# Altium PCB 海关全向控制器主控板V4.PcbDoc (part 1 of 3)
Units mil, origin at the board's own origin, x right, y up, seen from the top; angles counter-clockwise.
Board outline 3779.53 x 2795.28 mil, 2 copper layers (Top Layer, Bottom Layer), stack 65.792 mil thick; 119 components, 89 nets, 395 pads, 56 vias.
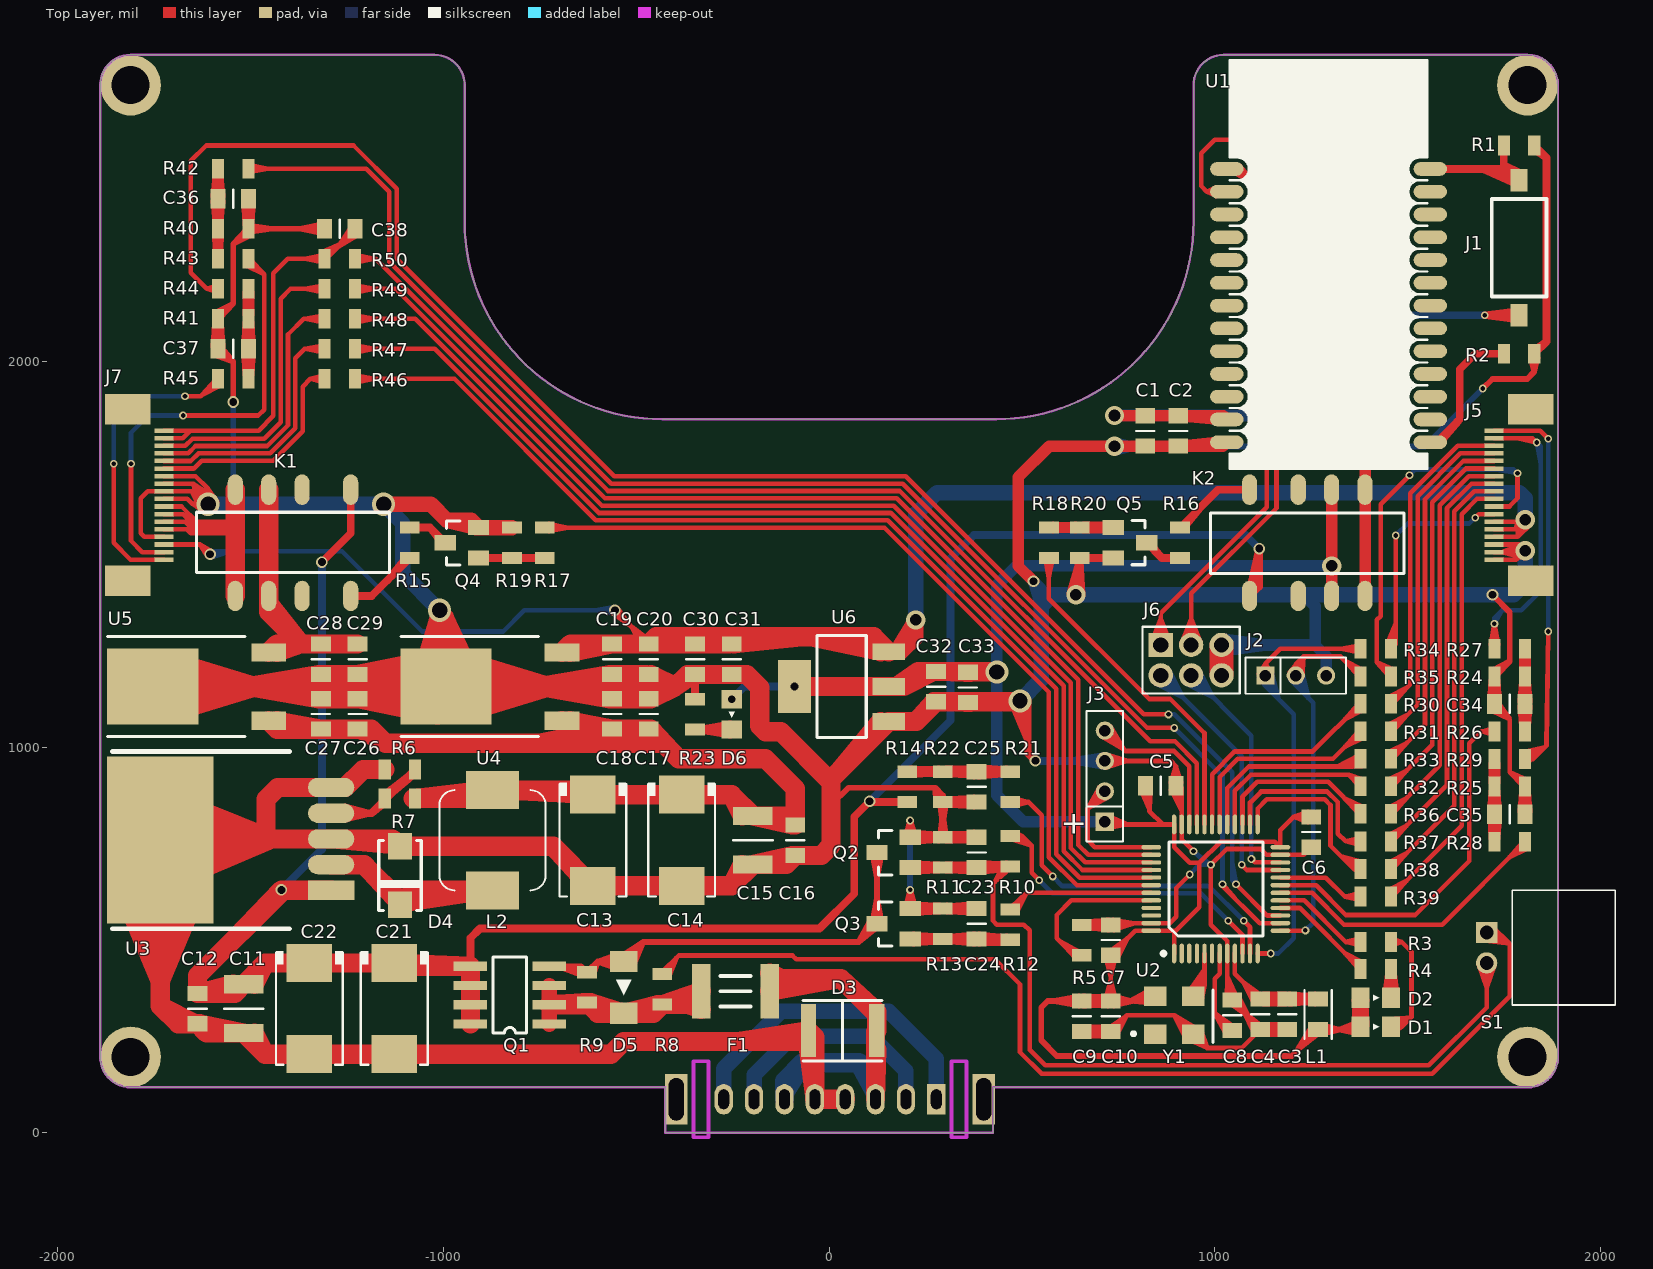
[diagram p0: Top Layer view]
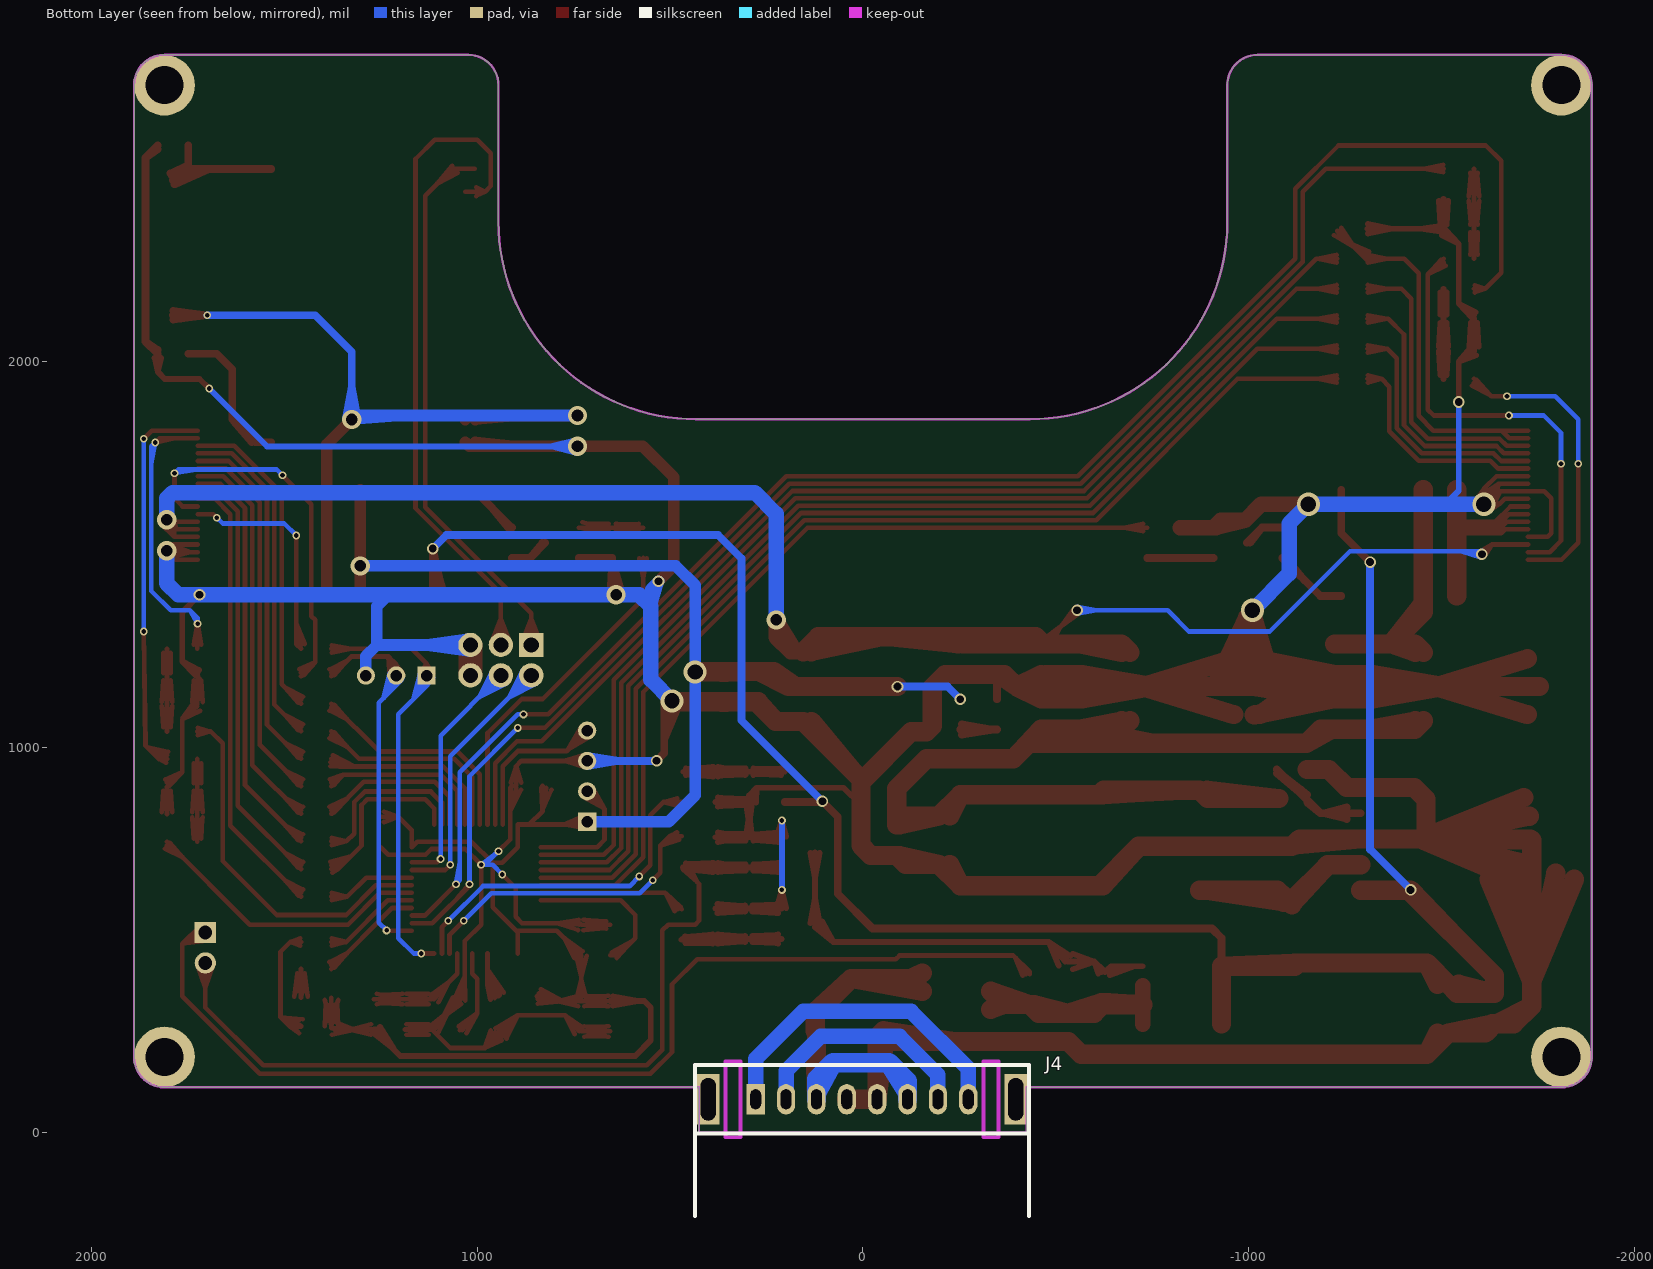
[diagram p1: Bottom Layer view, seen from below]
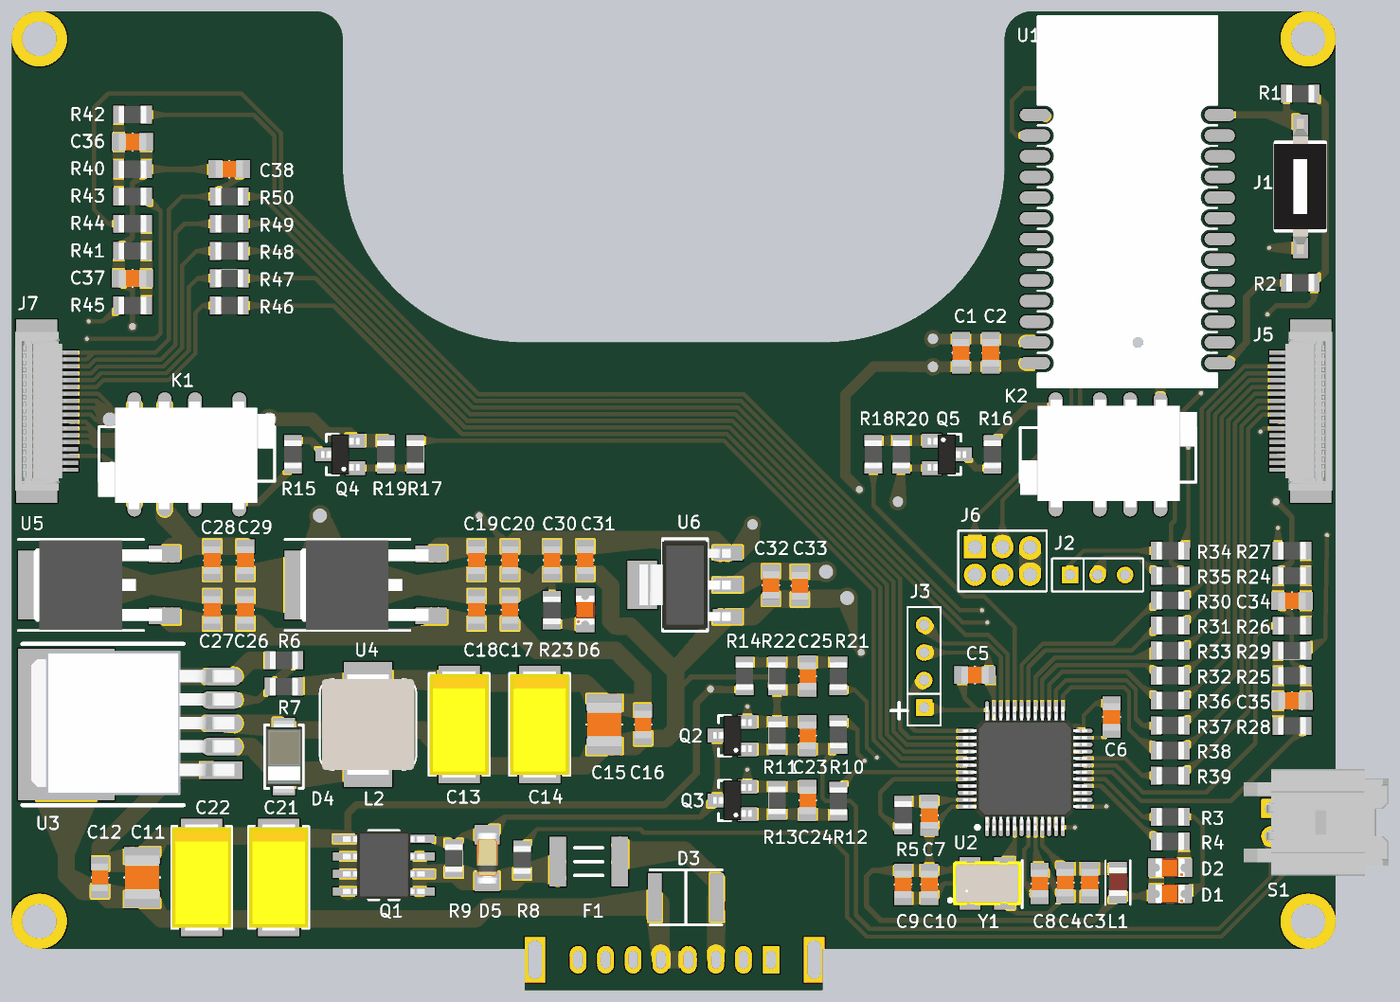
[diagram p4: 3D render of the assembled board from above, using the file's embedded part models]

## Layer stack, top to bottom
Top Solder: solder mask 0.4, Solder Resist, Dk 3.5
Top Layer: signal copper 1.4
Dielectric 1: dielectric 62.9921, FR-4, Dk 4.8
Bottom Layer: signal copper 1.4
Bottom Solder: solder mask 0.4, Solder Resist, Dk 3.5

## Board outline
-1889.76,196.85 ccw(c-1811.02,196.85) -1811.02,118.11 -425.2,118.11 -425.2,0 425.2,0 425.2,118.11 1811.02,118.11 ccw(c1811.02,196.85) 1889.76,196.85 1889.76,2716.54 ccw(c1811.02,2716.54) 1811.02,2795.28 1023.62,2795.28 ccw(c1023.62,2716.54) 944.88,2716.54 944.88,2362.21 cw(c433.07,2362.21) 433.07,1850.39 -433.07,1850.39 cw(c-433.07,2362.21) -944.88,2362.21 -944.88,2716.54 ccw(c-1023.62,2716.54) -1023.62,2795.28 -1811.02,2795.28 ccw(c-1811.02,2716.54) -1889.76,2716.54

## Design rules (kind name [scope] priority, off if disabled: settings)
Clearance [All] p1: gap=7
ComponentClearance [All] p1: gap=0 collisioncheckmode=3 verticalgap=0 showdistances=FALSE
Height [All] p1: minheight=0 maxheight=2000 prefheight=500
HoleSize [All] p1: absolutevalues=TRUE maxlimit=200 minlimit=1 maxpercent=80.000 minpercent=20.000
HoleToHoleClearance [All] p1: gap=6 allowstackedmicrovias=TRUE
MinimumSolderMaskSliver [All] p1: minsoldermaskwidth=0
PlaneConnect [All] p1: planeconnectstyle=Direct reliefexpansion=20 reliefentries=4 reliefconductorwidth=10 reliefairgap=10
PolygonConnect [All] p1: connectstyle=Direct reliefconductorwidth=10 reliefentries=4 polygonreliefangle="90 Angle" airgapwidth=10
RoutingVias [All] p1: holewidth=28 width=50 viastyle="Through Hole" minholewidth=8 minwidth=12 maxholewidth=200 maxwidth=300
SilkToSilkClearance [All] p1: silktosilkclearance=0
SilkToSolderMaskClearance [IsPad] p1: minsilkscreentomaskgap=0 clearancetoexposedcopper=TRUE
SolderMaskExpansion [All] p1: expansion=4
Width [All] p1: maxlimit=157.48 minlimit=10 preferedwidth=10
21 further rules are at their usual default settings.

## Classes and differential pairs
component class Designator: C11 C12 C13 C14 C15 C16 C17 C18 C19 C20 C21 C22 C23 C24 C25 C26 C27 C28 C29 C30 C31 C32 C33 D3 D4 D5 D6 F1 J4 K1 K2 L2 Q1 Q2 Q3 Q4 Q5 R6 R7 R8 R9 R10 R11 R12 R13 R14 R15 R16 R17 R18 R19 R20 R21 R22 R23 S1 U3 U4 U5 U6
component class 海关全向控制器主控板电路V4_系统管理: C34 C35 C36 C37 C38 J5 J6 J7 R24 R25 R26 R27 R28 R29 R30 R31 R32 R33 R34 R35 R36 R37 R38 R39 R40 R41 R42 R43 R44 R45 R46 R47 R48 R49 R50

## Components (designator, comment, footprint, x,y, rotation, side; value= is the part's Value field where it differs from the comment)
C1 "10uF" C0805 820,1820 r270 top
C2 "0.1uF" C0805 905,1820 r90 top
C3 "10uF" C0805 1187.88,307.4 r270 top
C4 "0.1uF" C0805 1117.88,307.4 r270 top
C5 "0.1uF" C0805 860,900 r0 top
C6 "0.1uF" C0805 1250,780 r270 top
C7 "0.1uF" C0805 730,500 r90 top
C8 "0.1uF" C0805 1045,305 r90 top
C9 "10uF" C0805 655,302.4 r270 top
C10 "10uF" C0805 730,302.4 r270 top
C11 "22uF" C1210 -1517.6,322.12 r270 top
C12 "0.1uF" C0805 -1637.6,322.12 r90 top
C13 "100uF/25V" C7343 -612.6,758.79 r270 top
C14 "100uF/25V" C7343 -382.6,758.79 r270 top
C15 "22uF" C1210 -197.6,758.79 r270 top
C16 "0.1uF" C0805 -87.6,758.79 r90 top
C17 "10uF" C0805 -467.6,1086.26 r90 top
C18 "0.1uF" C0805 -562.6,1086.26 r90 top
C19 "10uF" C0805 -562.6,1227.99 r270 top
C20 "0.1uF" C0805 -467.6,1227.99 r270 top
C21 "100uF/25V" C7343 -1127.6,322.12 r270 top
C22 "100uF/25V" C7343 -1347.6,322.12 r270 top
C23 "0.1uF" C0805 382.5,727.12 r90 top
C24 "0.1uF" C0805 382.5,542.12 r90 top
C25 "0.1uF" C0805 382.5,897.12 r270 top
C26 "10uF" C0805 -1222.6,1086.26 r90 top
C27 "0.1uF" C0805 -1317.6,1086.26 r90 top
C28 "10uF" C0805 -1317.6,1227.99 r270 top
C29 "0.1uF" C0805 -1222.6,1227.99 r270 top
C30 "10uF" C0805 -347.6,1227.99 r270 top
C31 "0.1uF" C0805 -252.6,1227.99 r270 top
C32 "10uF" C0805 277.4,1157.13 r270 top
C33 "0.1uF" C0805 360,1155 r270 top
C34 "0.1uF" C0805 1765,1112.14 r180 top
C35 "0.1uF" C0805 1765,826.42 r0 top
C36 "0.1uF" C0805 -1545,2422.14 r0 top
C37 "0.1uF" C0805 -1545,2032.86 r180 top
C38 "0.1uF" C0805 -1268.78,2344.29 r0 top
D1 "LED" LED0805 1417.4,275 r0 top
D2 "LED" LED0805 1417.4,350 r0 top
D3 "BA301N" BA301N 35,265 r180 top
D4 "SS14" SMA -1112.6,667.12 r270 top
D5 "ZMM16" SOD-80-S -532.6,377.12 r270 top
D6 "LED" LED0805 -252.6,1085 r270 top
F1 "2A 可恢复" F1812 -242.6,367.12 r180 top
J1 "Jack 1x2" A6S-1101-PH 1788.88,2295 r90 top
J2 "Jack 1x3" Jk1*3-2.0 1210,1185.76 r0 top
J3 "Jack 1x4" Jk1*4-2.0 715,925 r90 top
J4 "Jack 1x8" Pow-8P-M 2.4,87.12 r180 bottom
J5 "Jack 1x18" 0.5S-6X-18PB 1771.65,1653.54 r90 top locked
J6 "Jack 2x3" Jk2*3-2.0 860,1265 r0 top
J7 "Jack 1x18" 0.5S-6X-18PB -1771.65,1653.54 r270 top locked
K1 "G6K-2F-Y-12VDC" G6K-2F-Y -1390,1530 r180 top
K2 "G6K-2F-Y-12VDC" G6K-2F-Y 1240,1530 r0 top
L1 "10uH" L0805 1267.88,307.4 r90 top
L2 "33uH" L6.6*7.1mm -872.6,758.79 r90 top
Q1 "FDS4435" SO8 -827.6,357.12 r180 top
Q2 "S8050" SOT-23 167.4,727.12 r90 top
Q3 "S8050" SOT-23 167.4,542.12 r90 top
Q4 "S8050" SOT-23 -952.12,1530 r90 top
Q5 "S8050" SOT-23 780,1530 r270 top
R1 "1K" R0805 1788.88,2560 r0 top
R2 "1K" R0805 1788.88,2020 r180 top
R3 "1K" R0805 1417.4,495 r0 top
R4 "1K" R0805 1417.4,425 r0 top
R5 "100K" R0805 655,500 r90 top
R6 "2K" R0805 -1112.6,942.12 r0 top
R7 "10K" R0805 -1112.6,867.12 r0 top
R8 "500K" R0805 -432.6,372.12 r90 top
R9 "10K" R0805 -627.6,377.12 r90 top
R10 "10K" R0805 470,730 r270 top
R11 "200K" R0805 295,727.12 r90 top
R12 "1K" R0805 470,540 r270 top
R13 "10K" R0805 295,542.12 r90 top
R14 "10K" R0805 202.4,897.12 r90 top
R15 "0R" R0805 -1087.12,1530 r90 top
R16 "0R" R0805 910,1530 r270 top
R17 "1K" R0805 -737.12,1530 r90 top
R18 "1K" R0805 570,1530 r270 top
R19 "10K" R0805 -822.12,1530 r90 top
R20 "10K" R0805 650,1530 r270 top
R21 "1K" R0805 470,897.12 r90 top
R22 "1K" R0805 295,897.12 r90 top
R23 "1K" R0805 -347.6,1085 r90 top
R24 "10K" R0805 1765,1183.57 r0 top
R25 "10K" R0805 1765,897.85 r180 top
R26 "1K" R0805 1765,1040.71 r180 top
R27 "10K" R0805 1765,1255 r0 top
R28 "1K" R0805 1765,754.99 r0 top
R29 "10K" R0805 1765,969.28 r180 top
R30 "1K" R0805 1417.4,1112.88 r180 top
R31 "1K" R0805 1417.4,1041.44 r180 top
R32 "1K" R0805 1417.4,898.58 r180 top
R33 "1K" R0805 1417.4,970.01 r180 top
R34 "0R" R0805 1417.4,1255 r180 top
R35 "0R" R0805 1417.4,1183.57 r180 top
R36 "1K" R0805 1417.4,827.15 r180 top
R37 "1K" R0805 1417.4,755.72 r180 top
R38 "1K" R0805 1417.4,684.29 r180 top
R39 "1K" R0805 1417.4,612.86 r180 top
R40 "10K" R0805 -1545,2344.29 r180 top
R41 "10K" R0805 -1545,2110.71 r0 top
R42 "1K" R0805 -1545,2500 r0 top
R43 "10K" R0805 -1545,2266.43 r180 top
R44 "1K" R0805 -1545,2188.57 r180 top
R45 "10K" R0805 -1545,1955 r0 top
R46 "1K" R0805 -1268.78,1955 r0 top
R47 "1K" R0805 -1268.78,2032.86 r0 top
R48 "1K" R0805 -1268.78,2110.71 r0 top
R49 "1K" R0805 -1268.78,2188.57 r0 top
R50 "1K" R0805 -1268.78,2266.43 r0 top
S1 "SW-PB" 35363-0260 1705,480 r90 top
U1 "HC-05" HC-05 1295,2145 r0 top
U2 "STM32F103CB" LQFP48 1002.88,632.4 r90 top locked
U3 "LM2596-ADJ" TO-263-5 -1512.6,762.12 r90 top
U4 "78M05" TO-252 -842.6,1157.12 r90 top
U5 "78M05" TO-252 -1603.49,1157.12 r90 top
U6 "LM1117-3.3" SOT-223 32.4,1157.12 r90 top
Y1 "XTAL 8MHz" XTAL5032 895,305 r0 top

## Footprints (in the part's own frame and the unit in brackets; to place one, negate y for a bottom-side part, rotate by r counter-clockwise, add the part's x,y. Pads: shape width x height; smd on the part's side, far side on the other; paste and mask are expansions set on the pad)
0.5S-6X-18PB [mm]
  rect 0.3x1.25 smd: 1(-4.25,1.2) 2(-3.75,1.2) 3(-3.25,1.2) 4(-2.75,1.2) 5(-2.25,1.2) 6(-1.75,1.2) 7(-1.25,1.2) 8(-0.75,1.2) 9(-0.25,1.2) 10(0.25,1.2) 11(0.75,1.2) 12(1.25,1.2) 13(1.75,1.2) 14(2.25,1.2) 15(2.75,1.2) 16(3.25,1.2) 17(3.75,1.2) 18(4.25,1.2)
  rect 2x3 smd: ""(-5.65,-1.2) ""(5.65,-1.2)
  body extent -5.75,-2.75 5.75,1, height 1.27
35363-0260 [mm]
  rect 1.4x1.4 hole 0.9: 1(1,0)
  round 1.4 hole 0.9: 2(-1,0)
  silkscreen extent -3.8,-8.46 3.8,-1.67, body extent -3.86,-8.52 3.84,1.98, height 5.75
A6S-1101-PH [mm] "1位表贴拨码开关2.54mm间距"
  rect 1.5x1.1 smd: 1(-4.45,0) 2(4.45,0)
  silkscreen extent -3.2,-1.8 3.2,1.8, body extent -4.9,-1.92 4.9,1.92, height 3.4
BA301N [mm]
  rect 1x3.5 smd: 1(-2.25,0) 2(2.25,0)
  silkscreen extent -2.6,-2 2.6,2
C0805 [mm]
  rect 1x1.3 smd: 1(-1,0) 2(1,0)
  silkscreen extent 0,-0.6 0,0.6, body extent -1,-0.63 1,0.63, height 0.8
C1210 [mm]
  rect 1.2x2.6 smd: 1(-1.6,0) 2(1.6,0)
  silkscreen extent 0,-1.3 0,1.3, body extent -1.6,-1.25 1.6,1.25, height 0.95
C7343 [mm] "100uF/25V"
  rect 2.5x3 smd: 1(-3,0) 2(3,0)
  silkscreen extent -3.8,-2.2 3.7,2.2, body extent -3.87,-2.15 3.87,2.15, height 2.9
F1812 [mm]
  rect 1.2x3.6 smd: 1(-2.25,0) 2(2.25,0)
  silkscreen extent -1,-1 1,1, body extent -2.25,-1.65 2.25,1.65, height 0.42
G6K-2F-Y [mm]
  oval 1x2 smd: 1(-3.8,-3.5) 2(-0.6,-3.5) 3(1.6,-3.5) 4(3.8,-3.5) 5(3.8,3.5) 6(1.6,3.5) 7(-0.6,3.5) 8(-3.8,3.5)
  silkscreen extent -6.37,-2.01 6.36,1.95, body extent -6.36,-3.83 6.44,3.97, height 5.4
HC-05 [mm] "HC-05 蓝牙串口通信模块"
  oval 2.2x0.9 smd: 1(-6.7,9) 2(-6.7,7.5) 3(-6.7,6) 4(-6.7,4.5) 5(-6.7,3) 6(-6.7,1.5) 7(-6.7,0) 8(-6.7,-1.5) 9(-6.7,-3) 10(-6.7,-4.5) 11(-6.7,-6) 12(-6.7,-7.5) 13(-6.7,-9) 22(6.7,-9) 23(6.7,-7.5) 24(6.7,-6) 25(6.7,-4.5) 26(6.7,-3) 27(6.7,-1.5) 28(6.7,0) 29(6.7,1.5) 30(6.7,3) 31(6.7,4.5) 32(6.7,6) 33(6.7,7.5) 34(6.7,9)
  silkscreen extent -6.5,-10.75 6.5,16.15
Jk1*3-2.0 [mm]
  rect 1.2x1.2 hole 0.762: 1(-2,0)
  round 1.2 hole 0.762: 2(0,0) 3(2,0)
  silkscreen extent -3.3,-1.2 3.3,1.2
Jk1*4-2.0 [mm] "4P，直插，2.0mm间距，排母"
  rect 1.2x1.2 hole 0.762: 1(-3,0)
  round 1.2 hole 0.762: 2(-1,0) 3(1,0) 4(3,0)
  silkscreen extent -4.3,-1.2 4.3,1.2, body extent -4.25,-1.22 4.25,1.18, height 4.3
Jk2*3-2.0 [mm] "2.0双排座2*3-直"
  rect 1.6x1.6 hole 1: 1(0,0)
  round 1.6 hole 1: 2(0,-2) 3(2,0) 4(2,-2) 5(4,0) 6(4,-2)
  silkscreen extent -1.2,-3.2 5.2,1.2, body extent -1.03,-3.26 4.98,1.25, height 4.4
L6.6*7.1mm [mm] "AMPI0630ED"
  rect 2.5x3.5 smd: 1(-3.3,0) 2(3.3,0)
  silkscreen extent -3.3,-3.5 3.3,3.5, body extent -3.65,-3.35 3.65,3.35, height 3.13
L0805 [mm]
  rect 1x1.3 smd: 1(-1,0) 2(1,0)
  silkscreen extent -1.6,-0.9 1.6,0.9, body extent -0.95,-0.65 1.08,0.63, height 0.61
LED0805 [mm]
  rect 1.2x1.35 smd: 1(-1,0) 2(1,0)
  silkscreen extent -0.18,-0.2 0.22,0.2, body extent -1.05,-0.68 1.05,0.67, height 0.8
LQFP48 [mm]
  oval 1.3x0.28 smd: 1(-4.25,2.75) 2(-4.25,2.25) 3(-4.25,1.75) 4(-4.25,1.25) 5(-4.25,0.75) 6(-4.25,0.25) 7(-4.25,-0.25) 8(-4.25,-0.75) 9(-4.25,-1.25) 10(-4.25,-1.75) 11(-4.25,-2.25) 12(-4.25,-2.75) 25(4.25,-2.75) 26(4.25,-2.25) 27(4.25,-1.75) 28(4.25,-1.25) 29(4.25,-0.75) 30(4.25,-0.25) 31(4.25,0.25) 32(4.25,0.75) 33(4.25,1.25) 34(4.25,1.75) 35(4.25,2.25) 36(4.25,2.75)
  oval 0.28x1.3 smd: 13(-2.75,-4.25) 14(-2.25,-4.25) 15(-1.75,-4.25) 16(-1.25,-4.25) 17(-0.75,-4.25) 18(-0.25,-4.25) 19(0.25,-4.25) 20(0.75,-4.25) 21(1.25,-4.25) 22(1.75,-4.25) 23(2.25,-4.25) 24(2.75,-4.25) 37(2.75,4.25) 38(2.25,4.25) 39(1.75,4.25) 40(1.25,4.25) 41(0.75,4.25) 42(0.25,4.25) 43(-0.25,4.25) 44(-0.75,4.25) 45(-1.25,4.25) 46(-1.75,4.25) 47(-2.25,4.25) 48(-2.75,4.25)
  silkscreen extent -4.37,-3.1 3.1,3.57, body extent -4.49,-4.5 4.51,4.5, height 1.8
Pow-8P-M [mm] "笔记本电源接口8P公座"
  rect 1.2x2 hole 0.7 slot 1.3 at 90 deg: 1(-7,0)
  oval 1.2x2 hole 0.7 slot 1.3 at 90 deg: 2(-5,0) 3(-3,0) 4(-1,0) 5(1,0) 6(3,0) 7(5,0) 8(7,0)
  rect 1.5x3.3 hole 1 slot 2.8 at 90 deg: ""(-10.125,0) ""(10.125,0)
  Keep-Out Layer lines w0.254: 9,-2.5 9,2.5 8,2.5 8,-2.5 9,-2.5 ; -8,-2.5 -9,-2.5 -9,2.5 -8,2.5 -8,-2.5
  silkscreen extent -11,-7.7 11,2.25, body extent -10.77,-8 10.78,2, height 7
R0805 [mm]
  rect 0.8x1.3 smd: 1(-1,0) 2(1,0)
  body extent -1,-0.63 1,0.63, height 0.47
SMA [mm]
  rect 1.75x1.6 smd: 1(-1.925,0) 2(1.925,0)
  silkscreen extent -2.3,-1.5 2.3,1.5, body extent -2.6,-1.33 2.6,1.33, height 2.15
SO8 [mm]
  rect 2.2x0.6 smd: 1(-2.6,1.905) 2(-2.6,0.635) 3(-2.6,-0.635) 4(-2.6,-1.905) 5(2.6,-1.905) 6(2.6,-0.635) 7(2.6,0.635) 8(2.6,1.905)
  silkscreen extent -1.1,-2.5 1.1,2.5, body extent -2.97,-2.46 2.97,2.44, height 1.4
SOD-80-S [mm]
  rect 1.4x1.8 smd: 1(-1.7,0) 2(1.7,0)
  silkscreen extent -0.5,-0.5 0.5,0.5, body extent -1.85,-0.79 1.85,0.81, height 1.6
SOT-23 [mm]
  rect 1x1.4 smd: 1(-1,-1.1) 2(1,-1.1) 3(0,1.1)
  silkscreen extent -1.47,0.13 1.45,1, body extent -1.45,-1.4 1.45,1.4, height 1.3
SOT-223 [mm]
  rect 1.1x2.15 smd: 1(-2.3,-3.1) 2(0,-3.1) 3(2.3,-3.1)
  rect 3.5x2.15 smd: 4(0,3.1)
  silkscreen extent -3.35,-1.63 3.35,1.63, body extent -3.15,-3.3 3.15,3.3, height 1.8
TO-252 [mm]
  rect 1.2x2.28 smd: 1(-2.25,-3.816) 3(2.25,-3.816)
  rect 5x6 smd: 2(0,3.816)
  silkscreen extent -3.3,-2.27 3.3,6.78, body extent -3.25,-3.62 3.25,5.68, height 2.3
TO-263-5 [mil]
  rect 433.07x275.59 smd: 0(-3.33,221.44)
  rect 50x120 smd: 1(-133.33,-221.44)
  oval 50x120 smd: 2(-66.67,-221.44) 3(0,-221.44) 4(66.67,-221.44) 5(133.33,-221.44)
  silkscreen extent -233,-114 227,346, body extent -204,-258 207,321, height 177
XTAL5032 [mm]
  rect 1.5x1.3 smd: 1(-1.25,-1.25) 2(1.25,-1.25) 3(1.25,1.25) 4(-1.25,1.25)
  silkscreen extent -2.83,-1.78 2.54,1.65, body extent -2.5,-1.6 2.5,1.6, height 1.2

## Part data
C1 C11 C12 C15 C16 C17 C18 C19 C20 C23 C24 C25 C26 C27 C28 C29 C30 C31 C32 C33: library part CAP, "CAP"
C2: library part "Cap Semi"
C3 C4 C5 C6 C7 C8 C9 C10: library part Cap, "CAP"
C13 C14: library part ELECTRO, "Electrolytic Capacitor"
C21 C22: library part "Cap Poll"
C34 C35 C36 C37 C38: library part Cap, "Capacitor"
D1 D2 D6: "light emitted diode"
D4: library part Diode-Switch, "Silicon Epitaxial Planar Diodes"
D5: library part DIODE-ZENER, "Small Signal Zener Diodes"
F1: library part Fuse1
J1 J2 J3 J4 J5 J7: "插座"
J6: "双排座"
K1 K2: library part G6K-2F-Y
L1: library part INDUCTOR
L2: library part INDUCTOR, "INDUCTOR"
Q2 Q3: library part NPN, "NPN General Purpose Amplifier"
Q4 Q5: "NPN triode, 0.5A Max"
R1 R2 R3 R4 R6 R7 R8 R9 R10 R11 R12 R13 R14 R15 R16 R17 R18 R19 R20 R21 R22 R23 R24 R25 R26 R27 R28 R29 R30 R31 R32 R33 R34 R35 R36 R37 R38 R39 R40 R41 R42 R43 R44 R45 R46 R47 R48 R49 R50: library part Res
R5: library part RES
S1: "Switch"
U2: library part STM32F103Cx
U3: library part LM25x6-5, "LM2596-5;LM2576-5"
U6: library part LM1117, "800mA Linear Voltage Regulator"
Y1: library part XTAL

## Free pads (board coordinates)
  round 157.48 hole 98.43: ""(-1811.02,196.85) ""(-1811.02,2716.54) ""(1811.02,2716.54) ""(1811.02,196.85)

## Via types
v1: diameter 20, hole 12, Top Layer to Bottom Layer, tented both sides, 31 vias
v2: diameter 30, hole 20, Top Layer to Bottom Layer, tented both sides, 12 vias
v3: diameter 50, hole 30, Top Layer to Bottom Layer, tented both sides, 8 vias
v4: diameter 60, hole 40, Top Layer to Bottom Layer, tented both sides, 5 vias

## Nets (pads, with @x,y where several pads share a name; then routed paths per layer and width w, separated by ;. In a path a pad name is that pad's centre, name@x,y a point inside that pad or via, vN(x,y) a via of type N, cw(c..) or ccw(c..) an arc to the next point about the centre after c; other vN are vias at no path point)
5V_A: C28.1 C29.1 K1.3 K1.6 U5.3 | length 1565.6
  Top Layer w50: U5.3@-1453.25,1245.71 -1431.6,1267.36 -1370,1267.36 ; K1.6@-1452.99,1411.89 -1452.99,1581.57 ; -1452.99,1478.43 K1.3@-1452.99,1648.11 ; K1.3@-1452.99,1667.8 K1.6@-1452.99,1392.2 -1452.99,1350.35 ; U5.3@-1431.99,1245.71 -1370,1267.36 ; C28.1@-1323.51,1267.36 -1370,1267.36 ; -1452.99,1350.35 K1.6@-1452.99,1372.52 ; -1452.99,1350.35 K1.6@-1452.99,1372.52 ; -1452.99,1350.35 -1370,1267.36 ; K1.6@-1452.99,1372.52 -1370,1267.36 ; -1370,1267.36 C28.1@-1317.6,1267.36 ; C28.1@-1317.6,1267.36 -1228.51,1267.36 -1311.7,1267.36 C29.1@-1222.6,1267.36 C28.1@-1317.6,1267.36
+3.3V: C5.1 C6.1 C7.1 C9.1 C10.1 C32.1 C33.1 D1.1 D2.1 D6.1 J3.1 K2.3 K2.6 L1.1 U2.1 U2.24 U2.36 U2.48 U6.2 U6.4 Y1.4 | length 11803.9
  Top Layer w12: C9.1@655,341.77 C10.1@730,341.77 ; C9.1@659.64,328.14 C10.1@716.15,329.76 ; C9.1@659.64,355.4 C10.1@716.15,353.78 ; C9.1@665.41,328.85 C10.1@716.15,353.78 ; C9.1@665.41,354.69 C10.1@716.15,329.76 ; J3.1@715.48,789.27 775.7,799.72 ; C10.1@716.42,343.45 730,397.45 C10.1@743.58,343.45 ; C7.1@716.42,458.95 730,404.95 C7.1@743.58,458.95 ; J3.1@719.57,823.91 775.7,799.72 ; C10.1@722.41,328.19 C9.1@668.41,341.77 ; C10.1@722.41,355.35 C9.1@668.41,341.77 ; C10.1@724.09,341.77 C9.1@668.41,341.77 ; C7.1@726.67,470.73 775.14,505.77 ; C10.1@735.91,341.77 791.59,341.77 ; C7.1@735.91,460.63 775.14,505.77 ; C10.1@737.59,328.19 791.59,341.77 ; C10.1@737.59,355.35 791.59,341.77 ; C7.1@747.19,452.89 775.14,505.77 ; C5.1@807.54,890.11 830.63,837.69 ; U2.48@815.47,524.13 793.5,524.13 ; C5.1@820.63,894.09 830.63,837.69 ; C5.1@830.63,900 830.63,834.37 865.28,799.72 ; C5.1@834.29,894.86 830.63,837.69 ; Y1.4@835.26,372.66 777.91,341.77 ; Y1.4@839.97,361.57 777.91,341.77 ; Y1.4@841.85,354.21 777.91,341.77 ; Y1.4@842.66,334.64 777.91,341.77 ; Y1.4@842.86,346.69 777.91,341.77 ; Y1.4@845.79,354.21 833.34,341.77 C10.1@730,341.77 ; U2.48@855.63,524.13 897.14,524.13 ; U2.1@894.61,465.08 894.61,519.61 ; U2.1@894.61,485.15 894.61,519.61 ; U2.36@894.61,779.64 894.61,740.39 ; C6.1@1241.74,805.89 1204.37,819.37 ; C6.1@1241.74,832.85 1204.37,819.37 ; C6.1@1244.09,819.37 1204.37,819.37 ; C6.1@1250,819.37 1204.37,819.37 ; L1.1@1267.88,268.03 1371.06,268.03 D1.1@1378.03,275 D2.1@1378.03,350 ; L1.1@1273.78,268.03 1329.47,268.03 ; L1.1@1275.46,254.45 1329.47,268.03 ; L1.1@1275.46,281.61 1329.47,268.03 ; D1.1@1360.5,276.1 D2.1@1362.93,336.81 ; D2.1@1360.6,344.44 D1.1@1378.03,287.43 ; D1.1@1361.77,284.76 D2.1@1393.12,336.81 ; D1.1@1374.32,289.27 1317.53,268.03 ; D1.1@1376.63,254.48 1317.53,268.03 ; D1.1@1378.03,272.05 1317.53,268.03 ; D2.1@1378.03,347.05 D1.1@1378.03,287.43 ; D1.1@1394.28,284.76 D2.1@1362.93,336.81 ; D2.1@1395.46,344.44 D1.1@1378.03,287.43 ; D1.1@1395.55,276.1 D2.1@1393.12,336.81 ; C9.1@660.91,341.77 C10.1@716.59,341.77 ; C9.1@660.91,341.77 C10.1@716.15,353.78 ; C9.1@660.91,341.77 C10.1@716.59,341.77 ; C9.1@660.91,341.77 C10.1@716.15,329.76 ; C10.1@716.59,341.77 662.59,328.19 C10.1@716.59,341.77 ; C10.1@716.59,341.77 662.59,355.35 C10.1@716.59,341.77 ; C10.1@730,341.77 C7.1@730,460.63 793.5,524.13 ; 775.7,799.72 J3.1@715,806.89 722.17,799.72 865.28,799.72 ; 793.5,524.13 U2.48@835.55,524.13 899.13,524.13 ; 865.28,799.72 U2.36@894.61,799.72 ; 865.28,799.72 U2.36@894.61,799.72 ; 894.61,519.61 899.13,524.13 ; 894.61,740.39 U2.36@894.61,799.72 ; 894.61,740.39 935,700 960,700 ; 899.13,524.13 960,585 960,700 ; 960,700 1015,755 1155.86,755 ; 1155.86,755 U2.24@1170.2,740.67 ; 1155.86,755 U2.24@1170.2,740.67 ; U2.24@1170.2,740.67 1170.2,785.2 1204.37,819.37 ; D2.1@1362.93,336.81 D1.1@1378.03,277.95 ; D1.1@1378.03,277.95 D2.1@1378.03,337.57 ; D1.1@1378.03,277.95 D2.1@1378.03,337.57 ; D1.1@1378.03,277.95 D2.1@1393.12,336.81 ; D2.1@1378.03,337.57 1395.46,280.56 D2.1@1378.03,337.57 ; D2.1@1378.03,337.57 1360.6,280.56 D2.1@1378.03,337.57
  Top Layer w15: C9.1@647.95,329.64 584.41,341.77 ; C9.1@647.95,353.9 584.41,341.77 ; C9.1@649.09,341.77 584.41,341.77 ; C9.1@655,341.77 566.77,341.77 550,325 550,240 590.5,199.5 1199.35,199.5 L1.1@1267.88,268.03 ; L1.1@1252.17,275.27 1216.37,216.52 ; L1.1@1261.97,268.03 1216.37,216.52 ; L1.1@1270.34,259.18 1216.37,216.52
  Top Layer w30: K2.3@1302.99,1392.2 v3(1302.99,1470) ; K2.3@1302.99,1411.89 v3(1302.99,1470) ; 1302.99,1538.43 K2.6@1302.99,1648.11 ; K2.6@1302.99,1667.8 v3(1302.99,1470)
  Top Layer w50: U6.2@133.78,1157.12 -37.88,1157.12 ; v2(-89.65,1157.12) 75.35,1157.12 v2(-89.65,1157.12) ; v2(-89.65,1157.12) -37.88,1157.12 ; v2(-89.65,1157.12) 102.67,1157.12 v2(-89.65,1157.12) ; v2(-89.65,1157.12) -37.88,1157.12 ; v2(-89.65,1157.12) U6.2@154.45,1157.12 U6.2@192.12,1157.12 ; U6.2@192.12,1157.12 C32.1@271.49,1196.5 ; U6.2@192.12,1157.12 231.5,1196.5 ; 231.5,1196.5 C32.1@271.49,1196.5 ; 231.5,1196.5 C32.1@271.49,1196.5 ; 231.5,1196.5 C32.1@271.49,1196.5 ; 231.5,1196.5 175.12,1157.12 C32.1@271.49,1196.5 ; 231.5,1196.5 C32.1@277.4,1196.5 ; C32.1@277.4,1196.5 v4(435,1195) ; C32.1@277.4,1196.5 354.09,1194.37 C32.1@283.3,1196.5 ; C32.1@277.4,1196.5 v4@433.5,1196.5 ; C32.1@283.3,1196.5 v4(435,1195) ; C32.1@283.3,1196.5 v4@433.5,1196.5 ; v4@433.5,1196.5 365.91,1194.37 v4(435,1195) ; v4@433.5,1196.5 v4(435,1195)
  Bottom Layer w20: v2(-252.6,1124.37) -219.85,1157.12 v2(-89.65,1157.12)
  Bottom Layer w30: J3.1@715,806.89 503.11,806.89 435,875 v4(435,1195) 435,1420 485,1470 v3(1302.99,1470) v3@1305,1470
+3.3V_A: C3.1 C4.1 L1.2 U2.9 | length 2189.3
  Top Layer w12: U2.9@1052.09,445 1052.09,412.91 ; U2.9@1052.09,465.08 1052.09,412.91 ; C4.1@1100.65,339.08 1072.96,392.04 ; C4.1@1111.97,346.77 1072.96,392.04 ; C4.1@1121.25,356.83 1072.96,392.04 ; C4.1@1123.78,346.77 C3.1@1179.47,346.77 ; C4.1@1125.46,333.19 C3.1@1179.47,346.77 ; C4.1@1125.46,360.35 C3.1@1179.47,346.77 ; C3.1@1177.19,333.95 C4.1@1127.04,359.95 ; C3.1@1177.19,359.59 C4.1@1127.04,333.58 ; C3.1@1183.53,333.17 C4.1@1127.04,333.58 ; C3.1@1183.53,360.36 C4.1@1127.04,359.95 ; C3.1@1192.8,333.12 L1.2@1249.57,335.88 ; C3.1@1192.8,360.42 L1.2@1249.57,357.66 ; C3.1@1198,333.75 L1.2@1249.57,357.66 ; C3.1@1198,359.79 L1.2@1249.57,335.88 ; L1.2@1260.29,333.19 C3.1@1206.28,346.77 ; L1.2@1260.29,360.35 C3.1@1206.28,346.77 ; L1.2@1261.97,346.77 C3.1@1206.28,346.77 ; L1.2@1267.88,346.77 C4.1@1117.88,346.77 1117.88,347.12 1052.09,412.91 ; C4.1@1126.28,346.77 C3.1@1181.97,346.77 ; C4.1@1126.28,346.77 1180.29,360.35 C4.1@1126.28,346.77 ; C4.1@1126.28,346.77 1180.29,333.19 C4.1@1126.28,346.77 ; C4.1@1126.28,346.77 C3.1@1181.97,346.77 ; C4.1@1127.04,333.58 C3.1@1181.97,346.77 ; C4.1@1127.04,359.95 C3.1@1181.97,346.77 ; C3.1@1193.78,346.77 L1.2@1249.47,346.77 ; C3.1@1193.78,346.77 L1.2@1249.57,357.66 ; C3.1@1193.78,346.77 L1.2@1249.47,346.77 ; C3.1@1193.78,346.77 L1.2@1249.57,335.88 ; L1.2@1249.47,346.77 1195.46,333.19 L1.2@1249.47,346.77 ; L1.2@1249.47,346.77 1195.46,360.35 L1.2@1249.47,346.77
+3.3VOUT: C1.1 C2.2 J1.1 K2.4 K2.5 U1.12 | length 3792.1
  Top Layer w20: J1.1@1769.59,2110.83 v1(1700,2120) ; J1.1@1769.73,2128.79 v1(1700,2120) ; J1.1@1770,2119.8 v1(1700,2120) ; J1.1@1788.05,2108.18 1707.22,2119.8 J1.1@1788.05,2131.43 ; J1.1@1788.88,2119.8 1700.2,2119.8 v1(1700,2120)
  Top Layer w30: U1.12@1020.59,1859.37 910.91,1859.37 1005.63,1849.72 C2.2@905,1859.37 ; U1.12@1031.22,1849.72 1021.57,1859.37 C2.2@905,1859.37 ; v3(1325.28,1849.72) 1389.61,1785.39 ; K2.4@1389.61,1392.2 K2.5@1389.61,1667.8 1389.61,1785.39 ; K2.4@1389.61,1411.89 1389.61,1521.57 ; 1389.61,1538.43 K2.5@1389.61,1648.11 ; K2.5@1389.61,1687.48 1389.61,1785.39 ; v3(740,1860) 814.09,1859.37 v3@740.63,1859.37 ; v3(740,1860) C1.1@820,1859.37 ; v3(740,1860) v3@740.63,1859.37 ; v3@740.63,1859.37 C1.1@820,1859.37 ; C1.1@820,1859.37 899.09,1859.37 825.91,1859.37 C2.2@905,1859.37 ; C1.1@820,1859.37 C2.2@905,1859.37
  Bottom Layer w20: v3@1310.33,1851.05 1325.28,1934.72 v3@1340.22,1851.05 ; v3(1325.28,1849.72) 1325.28,2025.28 1420,2120 v1(1700,2120)
  Bottom Layer w30: v3(740,1860) 1315,1860 v3(1325.28,1849.72) 1207.29,1860
+5V: C19.1 C20.1 C30.1 C31.1 J5.4 J5.5 J5.6 J7.16 U4.3 U6.3 | length 8602
  Top Layer w12: J7.16@-1724.41,1525.59 -1630.59,1525.59 ; J7.16@-1705.71,1525.59 -1663.8,1525.59 ; v2@-1612.11,1494.48 -1630.59,1525.59 ; v2(-1605,1500) -1630.59,1525.59 ; v2@-1599.48,1507.11 -1630.59,1525.59 ; C19.1@-570,1274.76 C19.1@-562.6,1267.36 ; v2@-561.08,1348.16 -514.78,1314.54 v2@-548.39,1360.84 ; v2(-555.24,1355) C20.1@-467.6,1267.36 ; C20.1@-484.79,1259.62 -512.74,1312.5 ; C20.1@-473.51,1267.36 -512.74,1312.5 ; C20.1@-464.27,1277.46 -512.74,1312.5 ; J5.4@1724.41,1545.28 1785.28,1545.28 ; J5.5@1724.41,1564.96 1779.96,1564.96 ; J5.6@1724.41,1584.65 v3@1799.65,1584.65 ; J5.4@1743.11,1545.28 1785.02,1545.28 ; J5.5@1743.11,1564.96 1779.96,1564.96 ; J5.6@1743.11,1584.65 v3@1785.02,1584.65 ; v3@1786.46,1594.14 1785.28,1545.28 ; v3@1788.45,1599.34 1779.96,1564.96 ; v3@1798.41,1592.36 1785.28,1545.28 ; v3@1799.59,1594.44 1779.96,1564.96 ; v3@1809.44,1584.59 1779.96,1564.96 ; v3@1811.19,1586.72 1785.28,1545.28 ; v3@1814.34,1573.45 1779.96,1564.96 ; v3@1820.56,1579.1 1785.28,1545.28 ; 1779.96,1564.96 v3(1805,1590) ; 1779.96,1564.96 v3@1799.65,1584.65 ; 1785.28,1545.28 v3(1805,1590) ; 1785.28,1545.28 1805,1565 v3(1805,1590) ; v3@1799.65,1584.65 v3(1805,1590)
  Top Layer w40: U6.3@154.45,1247.68 U6.3@187.68,1247.68 ; U6.3@187.68,1247.68 v3(225,1330) ; U6.3@187.68,1247.68 225,1285 ; 225,1285 v3(225,1330) ; 225,1285 v3(225,1330) ; 225,1285 v3(225,1330) ; 225,1285 175.12,1247.68 v3(225,1330) ; 225,1285 v3(225,1330)
  Top Layer w50: U4.3@-692.36,1245.71 U4.3@-670.71,1267.36 ; -433.12,1286.5 C31.1@-258.51,1267.36 ; -71.43,1286.5 -246.7,1267.36 -166.27,1286.5 C30.1@-341.7,1267.36 ; -51.18,1286.5 U6.3@133.78,1247.68 ; U6.3@154.45,1247.68 115.63,1286.5 ; U4.3@-670.71,1267.36 -568.51,1267.36 -671.1,1245.71 C19.1@-562.6,1267.36 ; U4.3@-670.71,1267.36 C19.1@-562.6,1267.36 ; C19.1@-562.6,1267.36 -473.51,1267.36 -556.7,1267.36 C20.1@-467.6,1267.36 ; C19.1@-562.6,1267.36 C20.1@-467.6,1267.36 ; C20.1@-467.6,1267.36 C20.1@-448.47,1286.5 ; C20.1@-461.7,1267.36 C31.1@-258.51,1267.36 ; C20.1@-461.7,1267.36 -353.51,1267.36 C20.1@-448.47,1286.5 ; C20.1@-461.7,1267.36 -279.07,1286.5 ; C20.1@-448.47,1286.5 115.63,1286.5 ; C30.1@-341.7,1267.36 C31.1@-258.51,1267.36 ; C30.1@-341.7,1267.36 C31.1@-258.51,1267.36 ; C30.1@-341.7,1267.36 -279.07,1286.5 ; -279.07,1286.5 C31.1@-258.51,1267.36 ; -279.07,1286.5 C31.1@-258.51,1267.36 ; 115.63,1286.5 U6.3@133.78,1247.68 ; 115.63,1286.5 U6.3@133.78,1247.68
  Bottom Layer w12: v2@-1605.58,1508.98 -1550.63,1508 ; v2@-1602.97,1491.23 -1550.63,1508 ; v2@-556.03,1346.04 -606.24,1355 v2@-556.03,1363.96 ; v2(-555.24,1355) -790,1355 -845,1300 -1055,1300 -1263,1508 -1597,1508 v2(-1605,1500) -1550.63,1508
  Bottom Layer w40: v3(225,1330) 225,1605 280,1660 1790,1660 1805,1645 v3(1805,1590)
+5VAOUT: J7.11 J7.12 J7.13 J7.14 K1.4 K1.5 | length 1401.8
  Top Layer w12: J7.14@-1724.41,1564.96 -1664.96,1564.96 ; J7.13@-1724.41,1584.65 -1669.65,1584.65 ; J7.12@-1724.41,1604.33 -1674.33,1604.33 ; J7.11@-1724.41,1624.02 -1679.02,1624.02 ; J7.14@-1705.71,1564.96 -1664.96,1564.96 ; J7.13@-1705.71,1584.65 -1669.65,1584.65 ; J7.12@-1705.71,1604.33 -1674.33,1604.33 ; J7.11@-1705.71,1624.02 -1679.02,1624.02 ; -1554.61,1570 -1559.61,1565 ; -1539.61,1555 -1569.61,1555 ; -1679.02,1624.02 -1640,1585 -1539.61,1585 -1549.61,1575 -1645,1575 -1674.33,1604.33 ; -1669.65,1584.65 -1650,1565 -1559.61,1565 ; -1664.96,1564.96 -1655,1555 -1569.61,1555 ; -1569.61,1555 -1559.61,1565
  Top Layer w50: K1.5@-1539.61,1392.2 -1539.61,1555 ; K1.5@-1539.61,1411.89 -1539.61,1555 ; K1.4@-1539.61,1648.11 -1539.61,1585 ; K1.4@-1539.61,1667.8 -1539.61,1585 ; -1539.61,1555 -1539.61,1585
+7.2V: C13.1 C14.1 C15.1 C16.2 C17.1 C18.1 C26.1 C27.1 L2.2 R7.2 U4.1 U5.1 | length 7280.2
  Top Layer w50: U5.1@-1453.25,1068.54 U5.1@-1431.6,1046.89 ; L2.2@-907.48,867.12 R7.2@-1073.23,867.12 -892.29,888.71 -1078.23,867.12 -894.19,867.12 L2.2@-872.6,888.71 -624.41,888.71 C13.1@-612.6,876.9 C14.1@-382.6,876.9 -252.72,876.9 ; L2.2@-822.53,888.71 C13.1@-622.44,876.9 ; -756.19,1010 C18.1@-568.51,1046.89 ; U4.1@-692.36,1068.54 U4.1@-670.71,1046.89 ; -661.37,1010 C17.1@-473.51,1046.89 ; C13.1@-653.72,878.75 -852.92,888.71 C13.1@-653.7,888.71 ; C13.1@-591.66,876.9 C14.1@-392.44,876.9 ; C14.1@-372.76,876.9 -252.72,876.9 ; C15.1@-225.16,821.78 -252.72,876.9 ; U5.1@-1431.6,1046.89 -1323.51,1046.89 -1431.99,1068.54 C27.1@-1317.6,1046.89 ; U5.1@-1431.6,1046.89 C27.1@-1317.6,1046.89 ; C27.1@-1317.6,1046.89 -1228.51,1046.89 -1311.7,1046.89 C26.1@-1222.6,1046.89 ; C27.1@-1317.6,1046.89 C26.1@-1222.6,1046.89 ; C26.1@-1222.6,1046.89 -1186.89,1046.89 ; C26.1@-1216.7,1046.89 -1186.89,1046.89 ; C26.1@-1216.7,1046.89 -1150,1010 ; C26.1@-1216.7,1046.89 -1186.89,1046.89 ; -1186.89,1046.89 -1150,1010 ; -1150,1010 -430.71,1010 ; U4.1@-670.71,1046.89 C18.1@-568.51,1046.89 ; U4.1@-670.71,1046.89 C18.1@-562.6,1046.89 ; C18.1@-568.51,1046.89 -671.1,1068.54 C18.1@-562.6,1046.89 ; C18.1@-562.6,1046.89 C17.1@-473.51,1046.89 ; C18.1@-562.6,1046.89 C17.1@-467.6,1046.89 ; C18.1@-556.7,1046.89 C17.1@-473.51,1046.89 ; C18.1@-556.7,1046.89 C17.1@-473.51,1046.89 ; C18.1@-556.7,1046.89 -430.71,1010 ; C18.1@-556.7,1046.89 C17.1@-467.6,1046.89 ; C17.1@-467.6,1046.89 -430.71,1010 ; C17.1@-461.7,1046.89 -430.71,1010 ; C17.1@-461.7,1046.89 -390.71,970 ; C17.1@-461.7,1046.89 -430.71,1010 ; C17.1@-461.7,1046.89 -430.71,1010 ; C17.1@-461.7,1046.89 -430.71,1010 ; -430.71,1010 -390.71,970 ; -390.71,970 -165,970 -87.6,892.6 C16.2@-87.6,798.16 -111.22,821.78 ; -252.72,876.9 C15.1@-197.6,821.78 ; C15.1@-197.6,821.78 C16.2@-93.51,798.16 ; C15.1@-197.6,821.78 -111.22,821.78 ; -111.22,821.78 -170.04,821.78 C16.2@-93.51,798.16 ; -111.22,821.78 C16.2@-93.51,798.16 ; -111.22,821.78 C16.2@-93.51,798.16 ; C13.1@-602.76,876.9 -403.55,876.9 C13.1@-602.76,876.9
+12V: C11.1 C12.2 C21.1 C22.1 K1.1 K2.1 Q1.5 Q1.6 Q1.7 Q1.8 R14.1 U3.1 | length 8349
  Top Layer w20: v2(-1315,1480) -1240.39,1554.61 -1240.39,1664.61 K1.1@-1240.39,1667.8 ; -1240.39,1568.43 K1.1@-1240.39,1648.11 ; Q1.5@-929.96,432.12 -929.96,505.04 -905,530 -25,530 65,620 65,820 ; v2@116.81,857.75 R14.1@192.56,857.75 ; R14.1@180.1,857.75 v2(105,860) ; R14.1@180.5,857.75 v2(105,860) ; R14.1@202.4,857.75 v2@102.75,857.75 ; K2.1@1090.39,1392.2 1115,1416.81 ; 1098.59,1439.57 v2(1115,1515) ; 1115,1440 v2(1115,1515) ; 65,820 v2(105,860) ; 65,820 v2@102.75,857.75 ; v2@102.75,857.75 v2(105,860) ; K2.1@1090.39,1411.89 1115,1416.81 ; K2.1@1090.39,1411.89 1115,1494.98 v2(1115,1515) ; K2.1@1090.39,1411.89 1115,1416.81 ; 1115,1416.81 v2(1115,1515)
  Top Layer w50: -1538.57,506.43 v2(-1420,630) ; C11.1@-1490.04,385.12 -1462.48,440.24 ; C22.1@-1357.44,440.24 -1462.48,440.24 ; C22.1@-1336.66,440.24 C21.1@-1137.44,440.24 ; Q1.8@-929.96,282.12 Q1.7@-929.96,332.12 Q1.6@-929.96,382.12 Q1.5@-929.96,432.12 ; C12.2@-1637.6,361.5 -1545.16,385.12 -1631.7,361.5 C11.1@-1541.22,361.5 ; C12.2@-1637.6,361.5 C11.1@-1541.22,361.5 ; C12.2@-1637.6,361.5 -1637.6,407.4 v2@-1416.21,628.79 ; C11.1@-1541.22,361.5 C11.1@-1517.6,385.12 -1462.48,440.24 ; -1462.48,440.24 C22.1@-1347.6,440.24 C21.1@-1127.6,440.24 C21.1@-1119.49,432.12 ; v2(-1420,630) -1326.16,628.79 v2@-1416.21,628.79 ; v2(-1420,630) U3.1@-1291.16,628.79 v2@-1416.21,628.79 ; C21.1@-1119.49,432.12 -961.46,432.12 -1117.76,440.24 Q1.5@-929.96,432.12 ; C21.1@-1119.49,432.12 Q1.5@-929.96,432.12 ; C22.1@-1337.76,440.24 -1138.55,440.24 C22.1@-1337.76,440.24
  Bottom Layer w20: v2(-1420,630) -1315,735 v2(-1315,1480) ; v2(105,860) 315,1070 315,1490 375,1550 1080,1550 v2(1115,1515)
AD1: R26.2 U2.19 | length 1074.5
  Top Layer w12: U2.19@1170.2,642.24 1262.76,642.24 1340,565 1520,565 1660,705 1660,1010 1690.71,1040.71 ; U2.19@1190.28,642.24 1231.79,642.24 ; R26.2@1724.27,1031.05 1690.71,1040.71 ; R26.2@1724.27,1050.36 1690.71,1040.71 ; R26.2@1725.63,1040.71 1690.71,1040.71
AD2: R28.2 U2.18 | length 954.3
  Top Layer w12: U2.18@1170.2,622.56 1252.44,622.56 1335,540 1589.38,540 R28.2@1804.37,754.99 ; U2.18@1190.28,622.56 1231.79,622.56 ; R28.2@1797.76,752.31 1763.17,713.78 ; R28.2@1804.37,745.14 1763.17,713.78 ; R28.2@1809.52,736.87 1763.17,713.78
AD3: R44.2 U2.15 | length 4506.7
  Top Layer w12: R44.2@-1586,2178.96 -1613.57,2188.57 ; R44.2@-1586,2198.18 -1613.57,2188.57 ; R44.2@-1584.37,2188.57 -1613.57,2188.57 ; 834,1085 v1(880,1085) 816.22,1085 198.85,1702.37 -557.37,1702.37 -1121,2266 -1121,2447.87 -1233.13,2560 -1615,2560 -1655,2520 -1655,2230 -1613.57,2188.57 ; v1(1055,645) 1136.5,563.5 ; U2.15@1150.12,563.5 1136.5,563.5 ; U2.15@1170.2,563.5 1136.5,563.5
  Bottom Layer w12: 1045,700.66 v1(1055,645) 1045,655 1045,935 895,1085 ; 895,1085 v1(880,1085) 895,1085
AD4: R42.2 U2.14 | length 3993.4
  Top Layer w12: R42.2@-1505.63,2500 -1200,2500 -1140,2440 -1140,2258.13 -565.24,1683.37 190.98,1683.37 824.35,1050 v1(895,1050) 849,1050 ; R42.2@-1504.71,2490.3 -1453.88,2500 R42.2@-1504.71,2509.7 ; 1053.05,606.95 v1(1020,645) 1020,640 1116.18,543.82 ; U2.14@1150.12,543.82 1116.18,543.82 ; U2.14@1170.2,543.82 1116.18,543.82
  Bottom Layer w12: v1(895,1050) 1020,925 v1(1020,645)
AD_POW: R21.1 U2.11 | length 1145.2
  Top Layer w12: R21.1@470,857.75 517.25,857.75 ; R21.1@479.84,857.75 517.25,857.75 ; R21.1@481.11,848.09 517.25,857.75 ; R21.1@481.11,867.42 517.25,857.75 ; v1(1075,550) 1091.46,533.54 U2.11@1091.46,465.08 ; U2.11@1091.46,485.15 1091.46,526.67 ; 517.25,857.75 551,824 551,694 ; 551,694 v1(580,665) 551,694
  Bottom Layer w12: v1(580,665) 605,640 985,640 v1(1075,550) 1039.54,585.46
AD_POWKEY: R10.1 U2.10 | length 1182.2
  Top Layer w12: R10.1@470,769.37 500.63,769.37 ; R10.1@476.05,760.39 525,745 ; R10.1@485.27,777.47 525,745 ; v1(1035,550) 1071.77,513.23 ; U2.10@1071.77,465.08 1071.77,513.23 ; U2.10@1071.77,485.15 1071.77,513.23 ; R10.1@479.84,769.37 500.63,769.37 ; R10.1@479.84,769.37 525,745 ; R10.1@479.84,769.37 500.63,769.37 ; 500.63,769.37 482.13,759.89 500.63,769.37 ; 500.63,769.37 482.13,778.85 500.63,769.37 ; 500.63,769.37 525,745 ; 525,675 v1(545,655) 525,675 ; 525,675 525,745
  Bottom Layer w12: v1(545,655) 579,621 964,621 v1(1035,550) 999.54,585.46
BOOT0: R5.1 U2.44 | length 626.3
  Top Layer w12: R5.1@638.59,453.43 597.65,497.35 ; R5.1@645.16,460.63 597.65,497.35 ; R5.1@650.47,468.8 597.65,497.35 ; R5.1@655,460.63 634.37,460.63 590,505 590,565 627.87,602.87 U2.44@835.55,602.87 ; 773.96,602.87 U2.44@815.47,602.87
BT_RX: J6.3 U1.2 | length 2086.9
  Top Layer w12: J6.3@913.7,1269.82 938.74,1332.5 ; J6.3@925.31,1266.35 938.74,1332.5 ; J6.3@938.74,1265 938.74,1398.74 1160,1620 1160,2525 1110,2575 1000,2575 965,2540 965,2455 979.72,2440.28 ; J6.3@952.17,1266.35 938.74,1332.5 ; J6.3@963.78,1269.82 938.74,1332.5 ; U1.2@1002.98,2428.86 979.72,2440.28 ; U1.2@1002.98,2451.69 979.72,2440.28 ; U1.2@1005.63,2440.28 979.72,2440.28 ; U1.2@1031.22,2440.28 979.72,2440.28
BT_SET: J1.2 R1.1 U1.34 | length 1222.5
  Top Layer w20: U1.34@1533.78,2499.33 1759.74,2499.33 ; U1.34@1584.37,2499.33 1662.09,2499.33 ; R1.1@1749.51,2550.16 1749.51,2509.57 ; R1.1@1749.51,2560 1749.51,2509.57 ; J1.2@1784.79,2459.28 1694.53,2499.33 ; J1.2@1791.65,2481.52 1694.53,2499.33 ; J1.2@1795.06,2487.95 1749.51,2509.57 ; 1694.53,2499.33 J1.2@1788.88,2470.2 1759.74,2499.33 ; 1749.51,2509.57 J1.2@1788.88,2478.07 ; 1749.51,2509.57 J1.2@1780.6,2469.87 ; 1749.51,2509.57 1759.74,2499.33 ; 1759.74,2499.33 J1.2@1788.88,2478.07 ; 1759.74,2499.33 J1.2@1794.14,2488.47 ; 1759.74,2499.33 J1.2@1780.58,2469.89 ; 1759.74,2499.33 J1.2@1788.88,2478.07 ; 1759.74,2499.33 J1.2@1794.14,2488.47 ; 1759.74,2499.33 J1.2@1780.58,2469.89 ; 1759.74,2499.33 J1.2@1788.88,2478.07 ; 1759.74,2499.33 J1.2@1794.14,2488.47 ; 1759.74,2499.33 J1.2@1780.58,2469.89